# Altium PCB Sensor-Board.PcbDoc
Units mm, origin at the board's own origin, x right, y up, seen from the top; angles counter-clockwise.
Board outline 152.4 x 101.6 mm, 2 copper layers (Top Layer, Bottom Layer); 20 components, 18 nets, 90 pads, 7 vias.
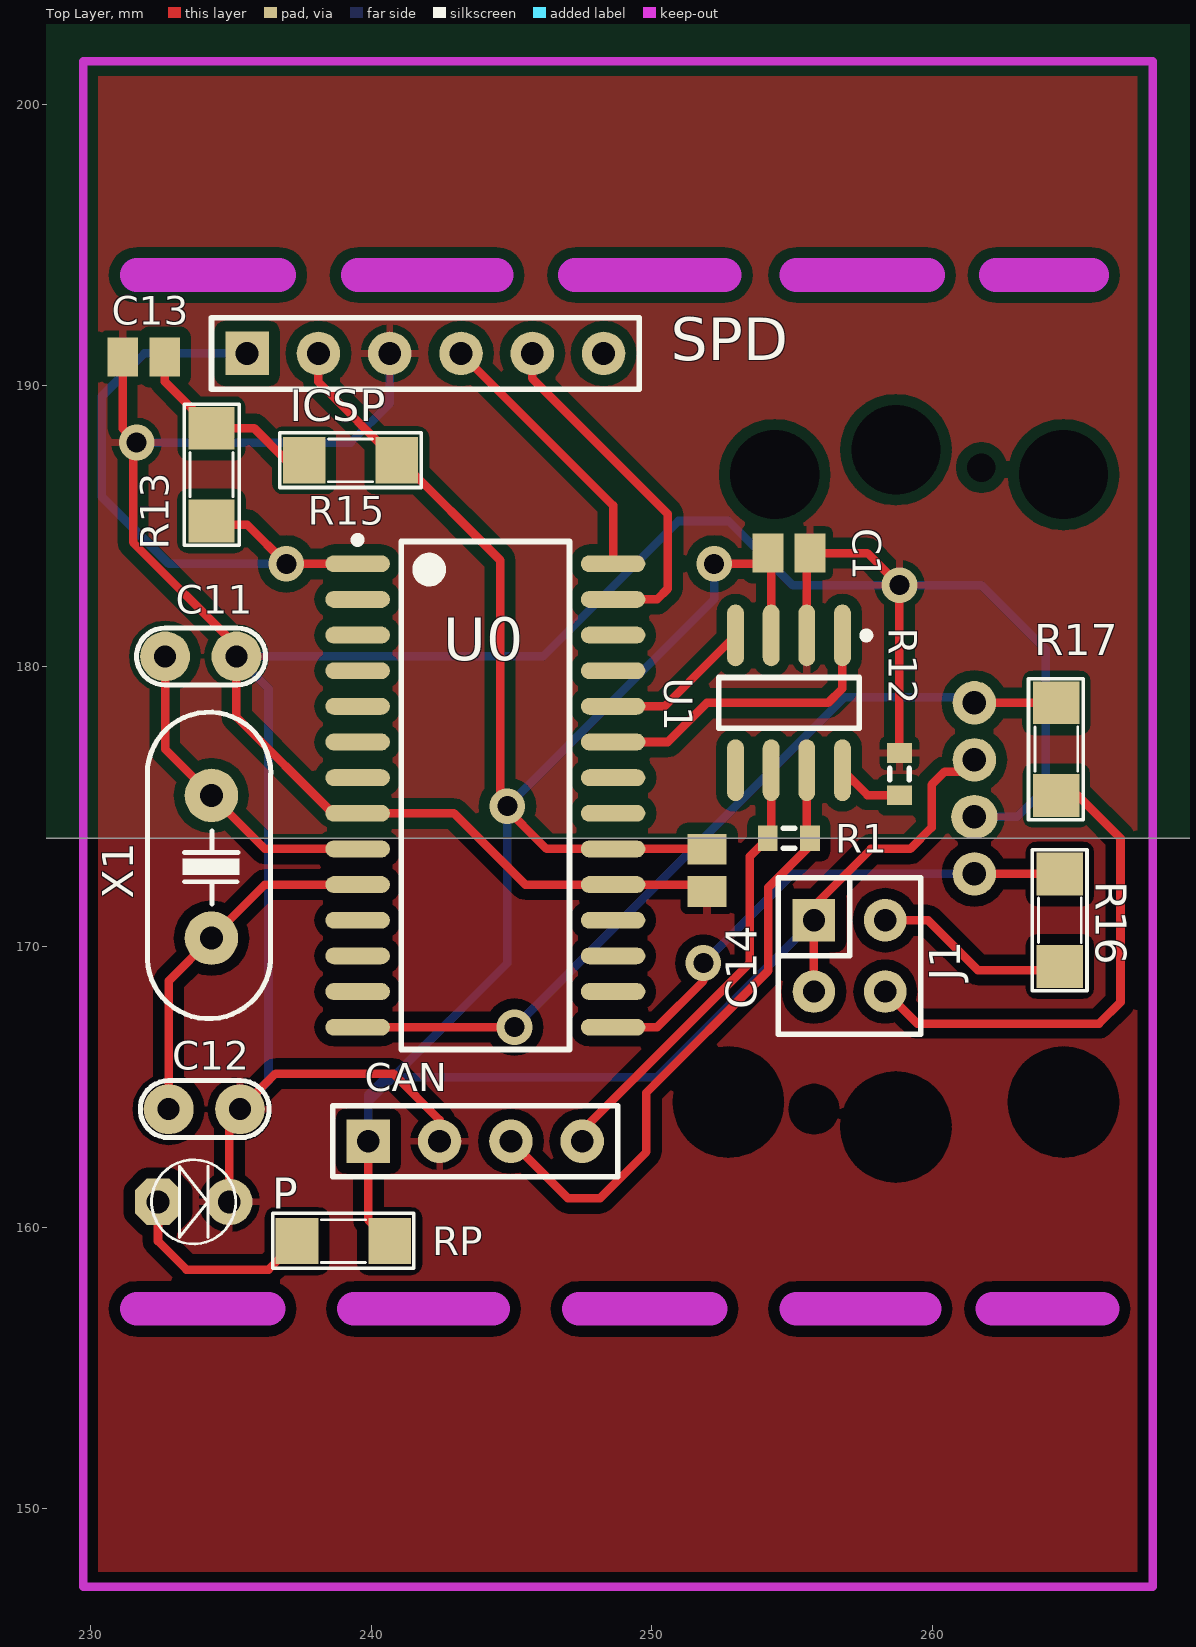
[diagram p0: Top Layer view]
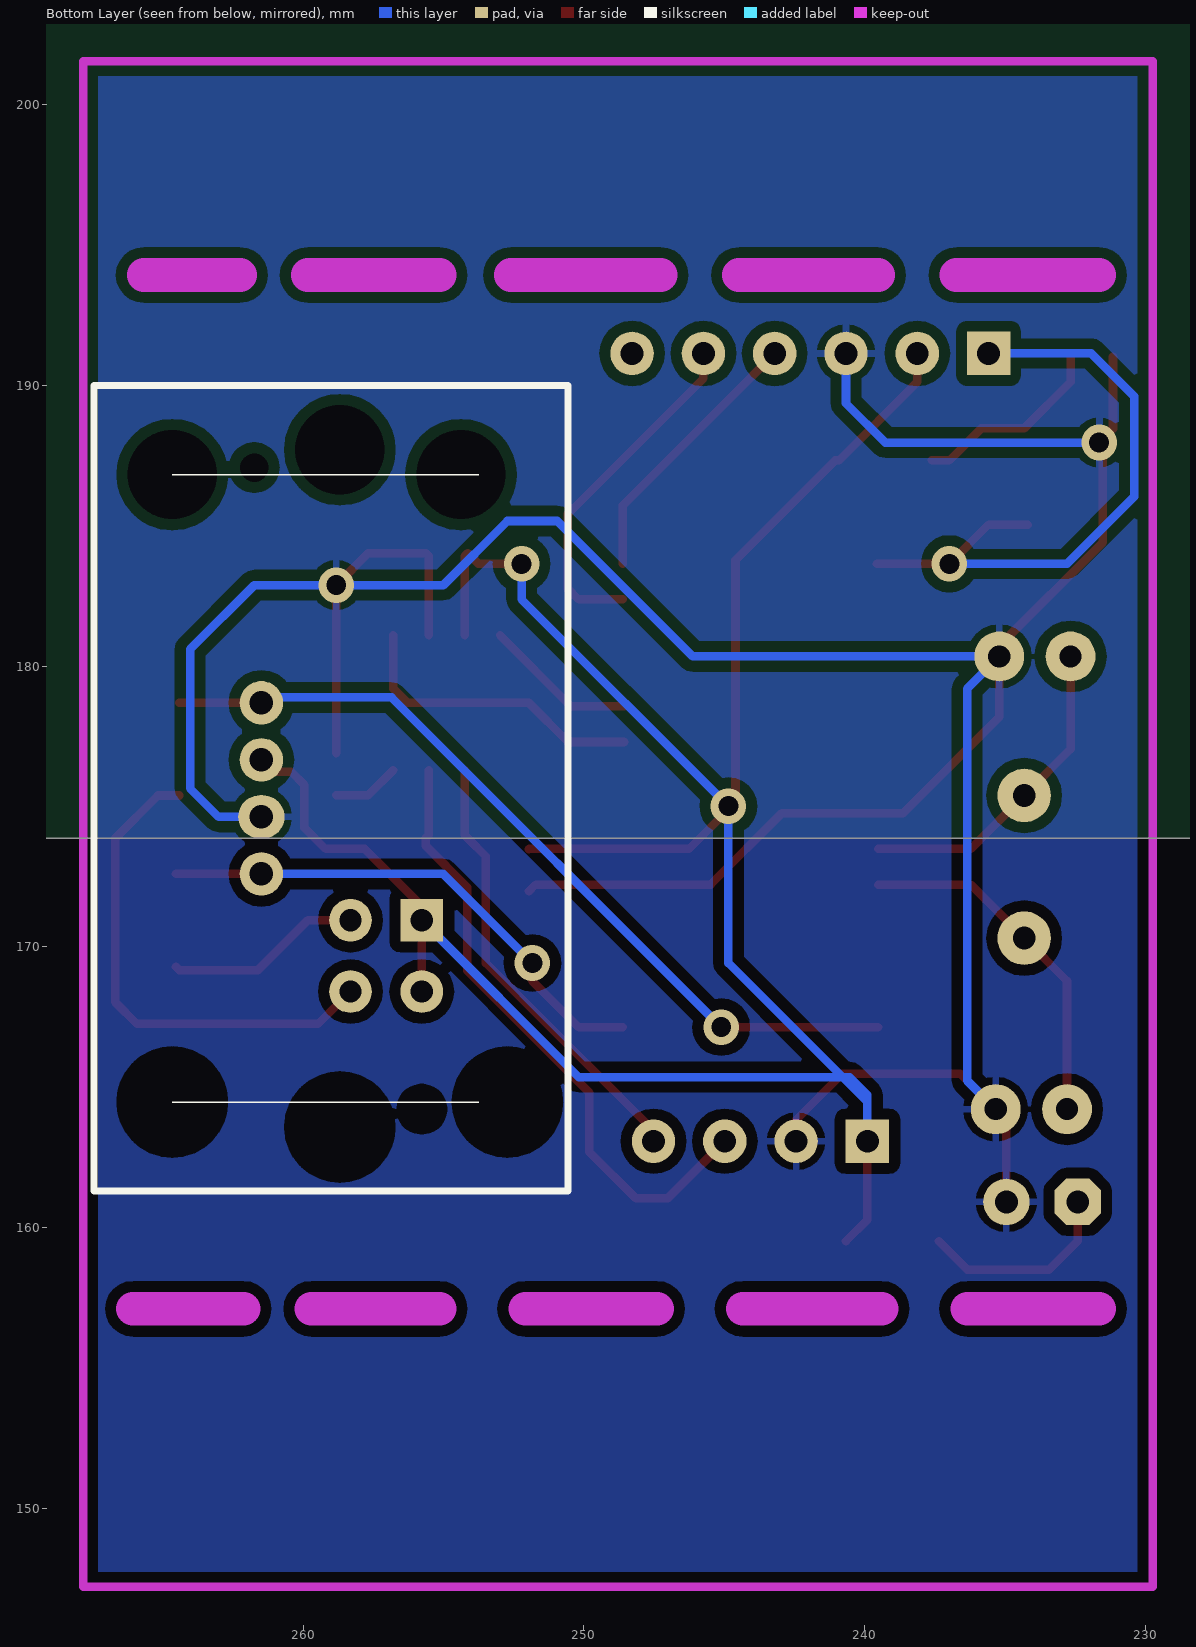
[diagram p1: Bottom Layer view, seen from below]

## Layer stack, top to bottom
Top Solder: solder mask 0.0102, Solder Resist, Dk 3.5
Top Layer: signal copper 0.0356
Dielectric 1: dielectric 0.32, FR-4, Dk 4.8
Bottom Layer: signal copper 0.0356
Bottom Solder: solder mask 0.0102, Solder Resist, Dk 3.5

## Board outline
145.923,173.863 298.323,173.863 298.323,275.463 145.923,275.463

## Design rules (kind name [scope] priority, off if disabled: settings)
Clearance "PolyGon Pour Clearance" [InPolyGon] p1: gap=0.381 ignorepadtopadclearanceinfootprint=FALSE except(0: Arc-Hole Track-Hole SMDPad-Hole THPad-Hole Via-Hole Fill-Hole Poly-Hole Region-Hole Text-Hole)
Clearance [All] p2: gap=0.356 ignorepadtopadclearanceinfootprint=FALSE except(0: Arc-Hole Track-Hole SMDPad-Hole THPad-Hole Via-Hole Fill-Hole Poly-Hole Region-Hole Text-Hole)
PolygonConnect [All] p1: connectstyle=Relief reliefconductorwidth=0.254 reliefentries=4 polygonreliefangle="90 Angle" airgapwidth=0.254
RoomDefinition sensorion_board [InComponentClass('sensorion_board')] p1: confinementstyle=ConfineIn formatcopy=TRUE lockcomponents=FALSE outline 299.466,175.387 303.022,175.387 303.022,180.213 299.466,180.213
RoutingVias [All] p1: holewidth=0.711 width=1.27 viastyle="Through Hole" minholewidth=0.711 minwidth=1.27 maxholewidth=0.711 maxwidth=1.27
SolderMaskExpansion [All] p1: expansion=0.102
Width VCC1 [(InNet('VCC1') AND InNet('VCC'))] p1: maxlimit=0.356 minlimit=0.356 preferedwidth=0.356
Width [All] p2: maxlimit=0.305 minlimit=0.305 preferedwidth=0.305
30 further rules are at their usual default settings.

## Components (designator, comment, footprint, x,y, rotation, side; value= is the part's Value field where it differs from the comment)
C1 "Cap Pol3" C0805 254.889,184.023 r0 top value=0.1uF
C11 "22pF" CN1 233.934,180.34 r0 top value=33pF
C12 "22pF" CN1 234.061,164.211 r0 top value=33pF
C13 "Cap Pol3" C0805 231.902,191.008 r180 top value=0.1uF
C14 "Cap Pol3" C0805 251.968,172.72 r270 top value=0.1uF
CAN "Header 4" HDR1X4 239.903,163.068 r0 top
ICSP "Header 6" HDR1X6 235.585,191.135 r0 top
J1 "JP2x2" JP2-C2T 257.048,169.672 r270 top
P "LED" LED-3MM-YELLOW 232.41,160.909 r0 top value="LED 3 ly Single Colour"
R1 "Res3" J1-0603 254.889,173.863 r0 top value=120
R12 "Res3" J1-0603 258.826,176.149 r90 top value=0
R13 "470" SM-RES-1206 234.315,188.468 r270 top value="R1/4W - 1K"
R15 "10k" SM-RES-1206 237.617,187.325 r0 top value="R1/4W - 1K"
R16 "10k" SM-RES-1206 264.541,169.291 r90 top value="R1/4W - 1K"
R17 "10k" SM-RES-1206 264.414,175.387 r90 top value="R1/4W - 1K"
RP "10k" SM-RES-1206 237.363,159.512 r0 top value="R1/4W - 1K"
SPD "Component_1" PCBComponent_1 196.723,183.769 r0 top
U0 "PIC18LF2480T-I/SO" SOIC-SO28_N 244.072,175.387 r0 top
U1 "MCP2551-E/SN" SOIC-SN8_N 254.889,178.689 r270 top
X1 "12Mhz" XT2 234.315,172.847 r90 top value=4Mhz

## Footprints (in the part's own frame and the unit in brackets; to place one, negate y for a bottom-side part, rotate by r counter-clockwise, add the part's x,y. Pads: shape width x height; smd on the part's side, far side on the other; paste and mask are expansions set on the pad)
C0805 [mm] "Chip Capacitor, Body 2.0x1.3mm, IPC High Density"
  rect 1.1x1.4 smd: 1(-0.75,0) 2(0.75,0)
  body extent -1.1,-0.72 1.1,0.72, height 1.4
CN1 [mil]
  round 70 hole 31: 1(-50,0) 2(50,0)
  silkscreen extent -90,-40 91,40, body extent -115,-33 115,33, height 265
HDR1X4 [mil] "Connector; Header; 4 Position"
  rect 61x61 hole 32: 1(0,0)
  round 61 hole 32: 2(100,0) 3(200,0) 4(300,0)
  silkscreen extent -50,-50 350,50
HDR1X6 [mil] "Connector; Header; 6 Position"
  rect 61x61 hole 32: 1(0,0)
  round 61 hole 32: 2(100,0) 3(200,0) 4(300,0) 5(400,0) 6(500,0)
  silkscreen extent -50,-50 550,50
J1-0603 [mm] "Chip Resistor, Body 1.6x0.8mm, IPC High Density"
  rect 0.7x0.9 smd: 1(-0.75,0) 2(0.75,0)
  silkscreen extent -0.2,-0.35 0.2,0.35, body extent -0.85,-0.48 0.85,0.48, height 0.9
JP2-C2T [mm] "4 pins, dual row, straight, gold plating"
  rect 1.52x1.52 hole 0.787: 1(-1.27,-1.27)
  round 1.52 hole 0.787: 2(1.27,-1.27) 3(1.27,1.27) 4(-1.27,1.27)
  silkscreen extent -2.79,-2.54 2.79,2.54, body extent -2.79,-2.54 2.79,2.54, height 8.51
LED-3MM-YELLOW [mil]
  oct 65x65 hole 32: 1(0,0)
  round 65 hole 32: 2(100,0)
  silkscreen extent -9,-59 109,59, body extent -27,-77 117,80, height 181
PCBComponent_1 [mil]
  round 61 hole 33: 1(2550,-200) 2(2550,-280) 4(2550,-440)
  oval 65x61 hole 33: 3(2550,-360)
  round 60 hole 125: 5(2205,-760) 5(2270,120) 5(2440,-795) 5(2440,155) 5(2675,-760) 5(2675,120)
  round 30 hole 40: 5(2325,-770) 5(2560,130)
SM-RES-1206 [mil]
  rect 60x65 smd: 1(0,0) 2(130,0)
  silkscreen extent -34,-38 164,39, body extent 2,-31 128,32, height 40
SOIC-SN8_N [mm] "SOIC, 8-Leads, Body 4.9x3.8mm, Pitch 1.27mm, IPC Medium Density"
  oval 2.2x0.6 smd: 1(-2.4,1.905) 2(-2.4,0.635) 3(-2.4,-0.635) 4(-2.4,-1.905) 5(2.4,-1.905) 6(2.4,-0.635) 7(2.4,0.635) 8(2.4,1.905)
  silkscreen extent -2.52,-2.5 0.9,2.88, body extent -2,-2.5 2,2.5, height 1.75
SOIC-SO28_N [mm] "SOIC, 28-Leads, Body 17.9x7.5mm, Pitch 1.27mm, IPC Medium Density"
  oval 2.3x0.6 smd: 1(-4.55,8.255) 2(-4.55,6.985) 3(-4.55,5.715) 4(-4.55,4.445) 5(-4.55,3.175) 6(-4.55,1.905) 7(-4.55,0.635) 8(-4.55,-0.635) 9(-4.55,-1.905) 10(-4.55,-3.175) 11(-4.55,-4.445) 12(-4.55,-5.715) 13(-4.55,-6.985) 14(-4.55,-8.255) 15(4.55,-8.255) 16(4.55,-6.985) 17(4.55,-5.715) 18(4.55,-4.445) 19(4.55,-3.175) 20(4.55,-1.905) 21(4.55,-0.635) 22(4.55,0.635) 23(4.55,1.905) 24(4.55,3.175) 25(4.55,4.445) 26(4.55,5.715) 27(4.55,6.985) 28(4.55,8.255)
  silkscreen extent -4.67,-9.05 3,9.23, body extent -3.8,-9.06 3.8,9.06, height 2.65
XT2 [mil] "Footpin for Crystal 2 pin"
  round 75 hole 32: 1(-100,0) 2(100,0)
  silkscreen extent -213,-83 217,90, body extent -216,-87 216,90, height 144

## Part data
C1 C13 C14: "Polarized Capacitor (Surface Mount)", LatestRevisionDate=29-May-2009, LatestRevisionNote="IPC-7351 Footprint Added.", PackageDescription="Chip Capacitor", PackageReference=C0805, Published=8-Jun-2000, Publisher="Altium Limited"
C11 C12: library part CN0, "Cremic For Xtal 1pF => 100pF"
CAN: "Header, 4-Pin", LatestRevisionDate=17-Jul-2002, LatestRevisionNote="Re-released for DXP Platform.", Publisher="Altium Limited"
ICSP: "Header, 6-Pin", LatestRevisionDate=17-Jul-2002, LatestRevisionNote="Re-released for DXP Platform.", Publisher="Altium Limited"
J1: "WR-PHD 2.54 mm Dual Socket Header", Manufacturer="Würth Elektronik eiSos GmbH", partNo=61300421821, ComponentLink1 Description=Manufacturer, ComponentLink1URL=http://www.we-online.com, ComponentLink2 Description=Datasheet, ComponentLink2URL=http://katalog.we-online.de/em/datasheet/6130xx21821.pdf, Created by="Karrer Zheng", Created Date="29 March 2013", NoPins=04
P: "LED Single colour Green and Red"
R1 R12: "Resistor", LatestRevisionDate=29-May-2009, LatestRevisionNote="IPC-7351 Footprint Added.", PackageDescription="Chip Resistor", PackageReference=J1-0603, Published=8-Jun-2000, Publisher="Altium Limited"
R13 R15 R16 R17 RP: library part R, "Resistor 1/4W"
U0: "Enhanced Flash Microcontroller with ECAN Technology, 10-Bit A/D and nanoWatt Technology, 16K Flash, 28-Pin SOIC, Industrial Temperature Range, Tape and Reel", Supplier Part Number 1=PIC18LF2480T-I/SO-ND, Code_JEDEC=MS-013, ComponentLink1Description=Datasheet, ComponentLink1URL=http://ww1.microchip.com/downloads/en/DeviceDoc/39637d.pdf, ComponentLink2Description="Packaging Specification", ComponentLink2URL=http://www.microchip.com/stellent/groups/techpub_sg/documents/packagingspec/en012702.pdf, ComponentLink3Description="Microchip.com Home", ComponentLink3URL=http://www.microchip.com/, DatasheetVersion="revD, Nov-2009", LatestRevisionDate=02-Dec-2009, LatestRevisionNote="Updated to datasheet revision D, Nov-2009", PackageDescription="28-Lead Plastic Small Outline (SO) - Wide 7.50mm Body [SOIC]", PackageReference=SOIC-SO28, PackageVersion="revBB, Aug-2009", Published=29-Jan-2009, Publisher="Altium Limited", Supplier 1=Digi-Key
U1: "High-Speed CAN Transceiver, 8-Pin SOIC, Extended Temperature", Supplier Part Number 1=MCP2551-E/SN-ND, Code_IPC=SOIC127P600-8, Code_JEDEC=MS-012, ComponentLink1Description=Datasheet, ComponentLink1URL=http://ww1.microchip.com/downloads/en/DeviceDoc/21667E.pdf, ComponentLink2Description="Packaging Specification", ComponentLink2URL=http://www.microchip.com/stellent/groups/techpub_sg/documents/packagingspec/en012702.pdf, ComponentLink3Description="Microchip.com Home", ComponentLink3URL=http://www.microchip.com/, DatasheetVersion="revE, Jan-2007", PackageDescription="8-Lead Plastic Small Outline (SN) - Narrow, 3.90mm Body [SOIC]", PackageReference=SOIC-SN8, PackageVersion="revBB, Aug-2009", Published=29-Jan-2009, Publisher="Altium Limited", Supplier 1=Digi-Key, Supplier 2=Farnell, Supplier 3=Farnell, Supplier Part Number 2=1467746, Supplier Part Number 3=4687887
X1: library part XT2, "Crystal, 32.768 KHz, -40 to 85 degC, 3.2 x 1.5 x 0.9 mm SMD"

## Via types
v1: diameter 1.27, hole 0.711, Top Layer to Bottom Layer, 7 vias

## Nets (pads, with @x,y where several pads share a name; then routed paths per layer and width w, separated by ;. In a path a pad name is that pad's centre, name@x,y a point inside that pad or via, vN(x,y) a via of type N, cw(c..) or ccw(c..) an arc to the next point about the centre after c; other vN are vias at no path point)
GND1: C1.2 C11.2 C12.2 C13.2 C14.2 CAN.2 ICSP.3 P.2 R12.2 SPD.3 U0.8 U0.19 U1.2 | length 128.7
  Top Layer w0.305: C13.2 231.152,188.456 v1(231.648,187.96) 231.521,187.96 231.521,184.404 235.204,180.721 C11.2 235.204,178.181 238.633,174.752 U0.8 ; P.2@235.331,161.29 P.2 234.95,163.83 C12.2 236.601,165.481 240.792,165.481 242.443,163.83 CAN.2 ; U0.8@239.572,174.752 242.951,174.752 245.491,172.212 251.726,172.212 C14.2 ; U1.2 255.524,183.908 C1.2 257.683,184.023 v1(258.826,182.88) R12.2
  Bottom Layer w0.305: v1(231.648,187.96) 239.268,187.96 240.665,189.357 ICSP.3 ; C12.2 236.347,165.227 236.347,179.197 C11.2 246.126,180.34 250.952,185.166 252.73,185.166 255.016,182.88 v1(258.826,182.88) 261.747,182.88 264.033,180.594 264.033,175.641 263.017,174.625 SPD.3
NetC11_1: C11.1 U0.9 X1.2 | length 11.6
  Top Layer w0.305: C11.1 232.664,177.038 X1.2 236.22,173.482 U0.9
NetC12_1: C12.1 U0.10 X1.1 | length 12.7
  Top Layer w0.305: C12.1 232.791,168.783 X1.1 236.22,172.212 U0.10
NetC13_1: C13.1 R13.1 R15.1 | length 7
  Top Layer w0.305: C13.1 232.652,190.131 R13.1 235.839,188.468 236.982,187.325 R15.1
NetCAN_3: CAN.3 R1.2 U1.7 | length 22.4
  Top Layer w0.305: CAN.3 247.015,161.036 248.158,161.036 249.809,162.687 249.809,164.801 254.152,169.144 254.152,172.11 255.639,173.597 R1.2 255.524,173.978 U1.7
NetCAN_4: CAN.4 R1.1 U1.6 | length 16
  Top Layer w0.305: CAN.4 247.523,163.449 253.492,169.418 253.492,173.216 R1.1 254.254,173.978 U1.6
NetICSP_1: ICSP.1 R13.2 U0.1 | length 22.9
  Top Layer w0.305: R13.2@234.188,185.039 235.585,185.039 v1(236.982,183.642) U0.1 U0.1@239.572,183.642
  Bottom Layer w0.305: ICSP.1 231.927,191.135 230.403,189.611 230.403,186.03 232.791,183.642 v1(236.982,183.642)
NetICSP_4: ICSP.4 U0.28 | length 9.7
  Top Layer w0.305: ICSP.4 248.622,185.718 U0.28
NetICSP_5: ICSP.5 U0.27 | length 12.5
  Top Layer w0.305: ICSP.5 245.745,190.246 250.571,185.42 250.571,182.753 250.19,182.372 U0.27
NetJ1_3: J1.3 R17.1 | length 17.9
  Top Layer w0.305: J1.3 259.461,167.259 265.938,167.259 266.7,168.021 266.7,173.863 265.176,175.387 R17.1
NetJ1_4: J1.4 R16.1 | length 7
  Top Layer w0.305: J1.4 259.842,170.942 261.62,169.164 264.414,169.164 R16.1
NetP_1: P.1 RP.1 | length 7.2
  Top Layer w0.305: P.1 232.41,159.512 233.426,158.496 236.347,158.496 RP.1
NetR12_1: R12.1 U1.8 | length 2.4
  Top Layer w0.305: U1.8 257.684,175.399 R12.1
NetR16_2: R16.2 SPD.4 U0.15 | length 18.8
  Top Layer w0.305: U0.15 250.19,167.132 251.841,168.783 v1(251.841,169.418) ; SPD.4 R16.2
  Bottom Layer w0.305: v1@251.841,169.672 v1(251.841,169.418) 255.016,172.593 SPD.4
NetR17_2: R17.2 SPD.1 U0.14 | length 29.8
  Top Layer w0.305: U0.14 v1(245.11,167.132) ; SPD.1 R17.2
  Bottom Layer w0.305: v1(245.11,167.132) 256.858,178.879 261.303,178.879 SPD.1
NetU0_23: U0.23 U1.1 | length 10.9
  Top Layer w0.305: U0.23@248.572,177.292 250.571,177.292 251.968,178.689 256.286,178.689 256.794,179.197 U1.1
NetU0_24: U0.24 U1.4 | length 5.5
  Top Layer w0.305: U0.24@248.572,178.562 250.457,178.562 U1.4
VCC1: C1.1 C14.1 CAN.1 ICSP.2 J1.1 J1.2 R15.2 RP.2 SPD.2 U0.20 U1.3 | length 92.4
  Top Layer w0.305: ICSP.2 238.125,190.119 R15.2 241.046,187.325 244.602,183.769 244.602,175.133 246.253,173.482 251.956,173.482 C14.1 ; CAN.1 239.903,160.274 RP.2 ; v1(252.222,183.642) 253.758,183.642 C1.1 254.254,183.908 U1.3 ; J1.2 J1.1 255.778,171.45 257.81,173.482 259.207,173.482 259.969,174.244 259.969,175.768 260.44,176.239 261.374,176.239 SPD.2@261.642,176.508
  Bottom Layer w0.305: CAN.1 239.903,164.465 ; v1(252.222,183.642) 252.222,182.372 v1(244.856,175.006) 244.856,169.418 240.792,165.354 ; J1.1@255.778,171.323 J1.1 250.19,165.354 240.792,165.354 ; 239.903,164.465 239.903,164.719 240.538,165.354 240.792,165.354 ; 239.903,164.465 240.792,165.354
pads on no net: ICSP.6 SPD.5 U0.2 U0.3 U0.4 U0.5 U0.6 U0.7 U0.11 U0.12 U0.13 U0.16 U0.17 U0.18 U0.21 U0.22 U0.25 U0.26 U1.5

## Polygon pours and split planes (outlines as drawn)
GND1 on Bottom Layer "Top Layer-No Net" (solid, pour order 6): 229.743,201.549 267.843,201.549 267.843,147.32 267.716,147.193 229.743,147.193
GND1 on Top Layer "Top Layer-No Net" (solid, pour order 8): 229.743,201.549 267.843,201.549 267.843,147.193 267.589,147.447 229.743,147.447

## Keep-outs
Keep-Out Layer:
  lines w0.305: 229.743,147.193 229.743,155.448 229.743,193.294 229.743,201.549 267.843,201.549 267.843,147.193 229.743,147.193
  lines w1.2: 231.648,157.099 236.347,157.099 ; 231.648,193.929 236.728,193.929 ; 239.395,157.099 244.348,157.099 ; 239.522,193.929 244.475,193.929 ; 247.269,193.929 252.603,193.929 ; 247.396,157.099 252.095,157.099 ; 255.143,157.099 259.715,157.099 ; 255.143,193.929 259.842,193.929 ; 262.128,157.099 266.065,157.099 ; 262.255,193.929 265.684,193.929